# EAGLE board MiniGen-Panel-v10 (EAGLE 6.5.0), part 1 of 3
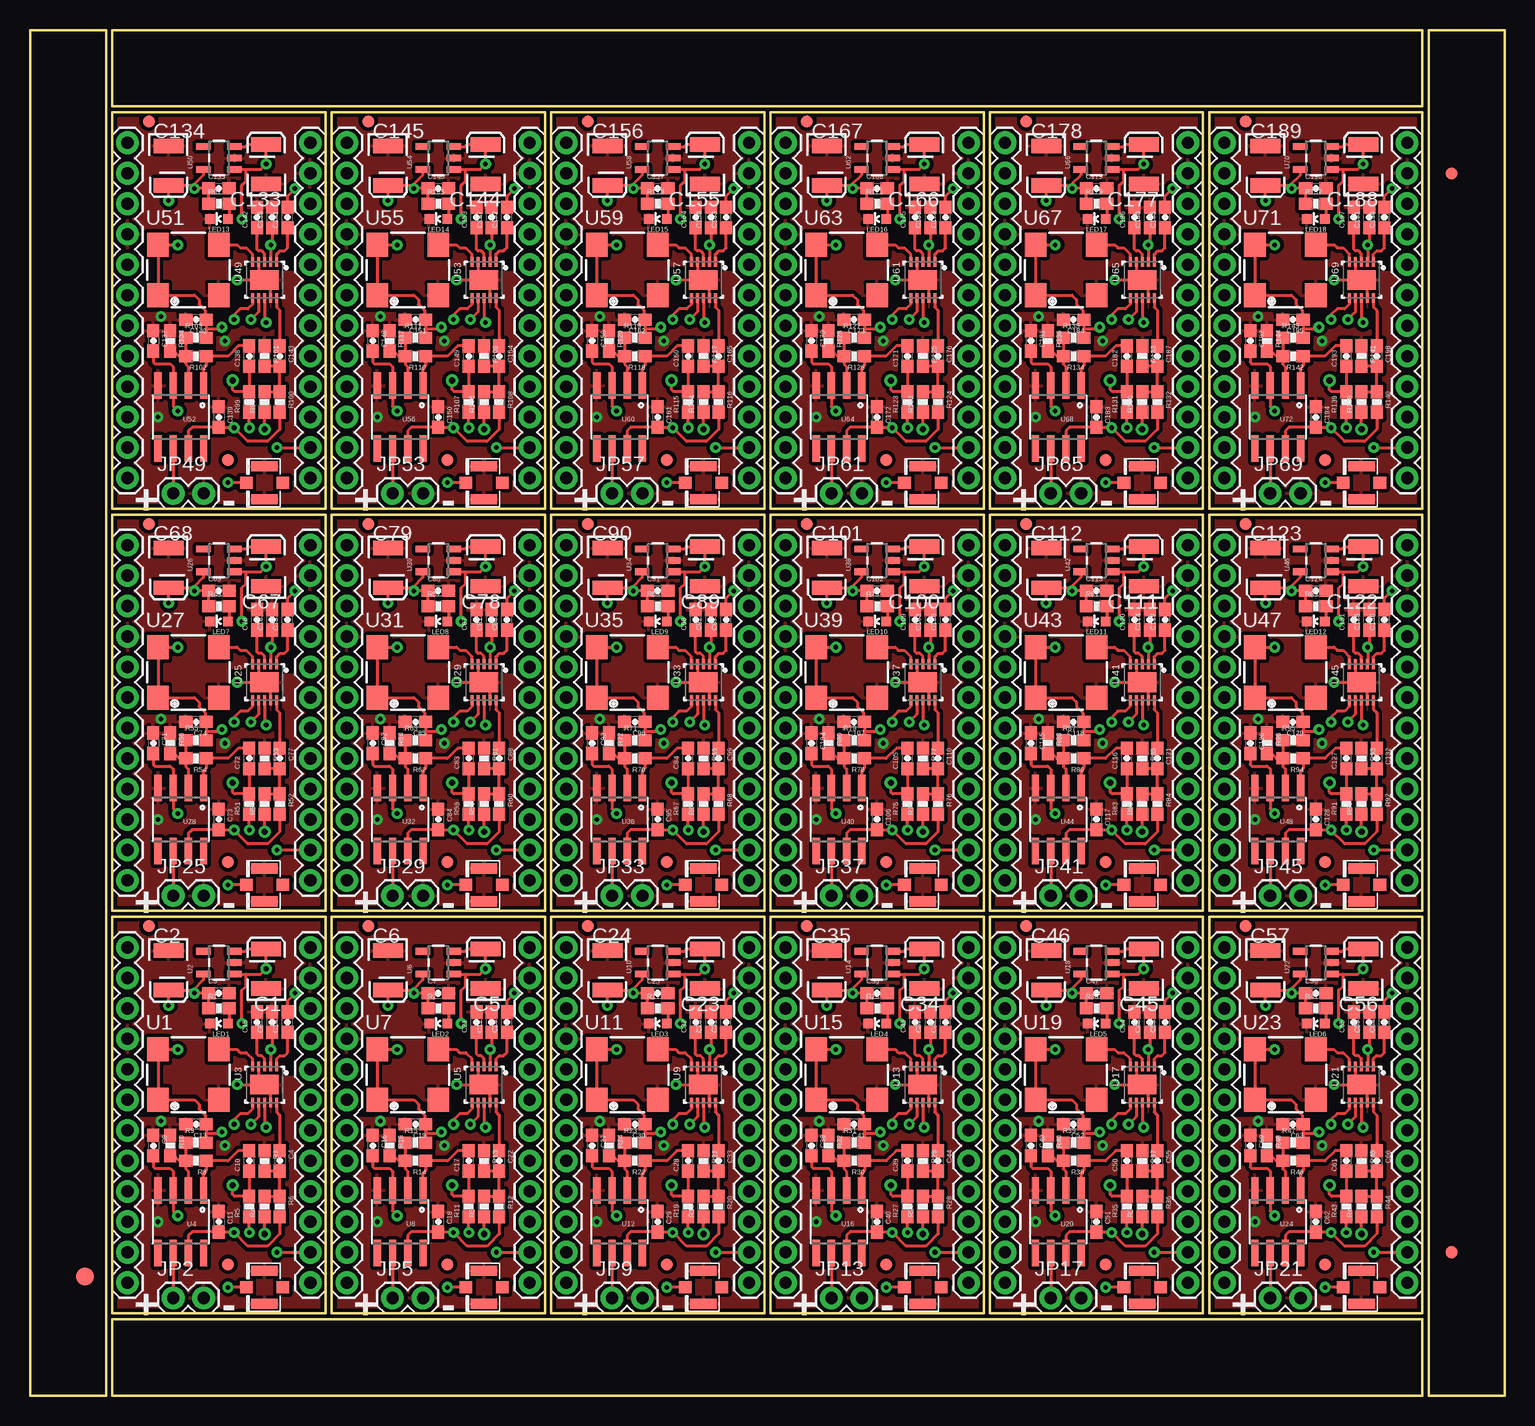
[diagram p0: board, top side]
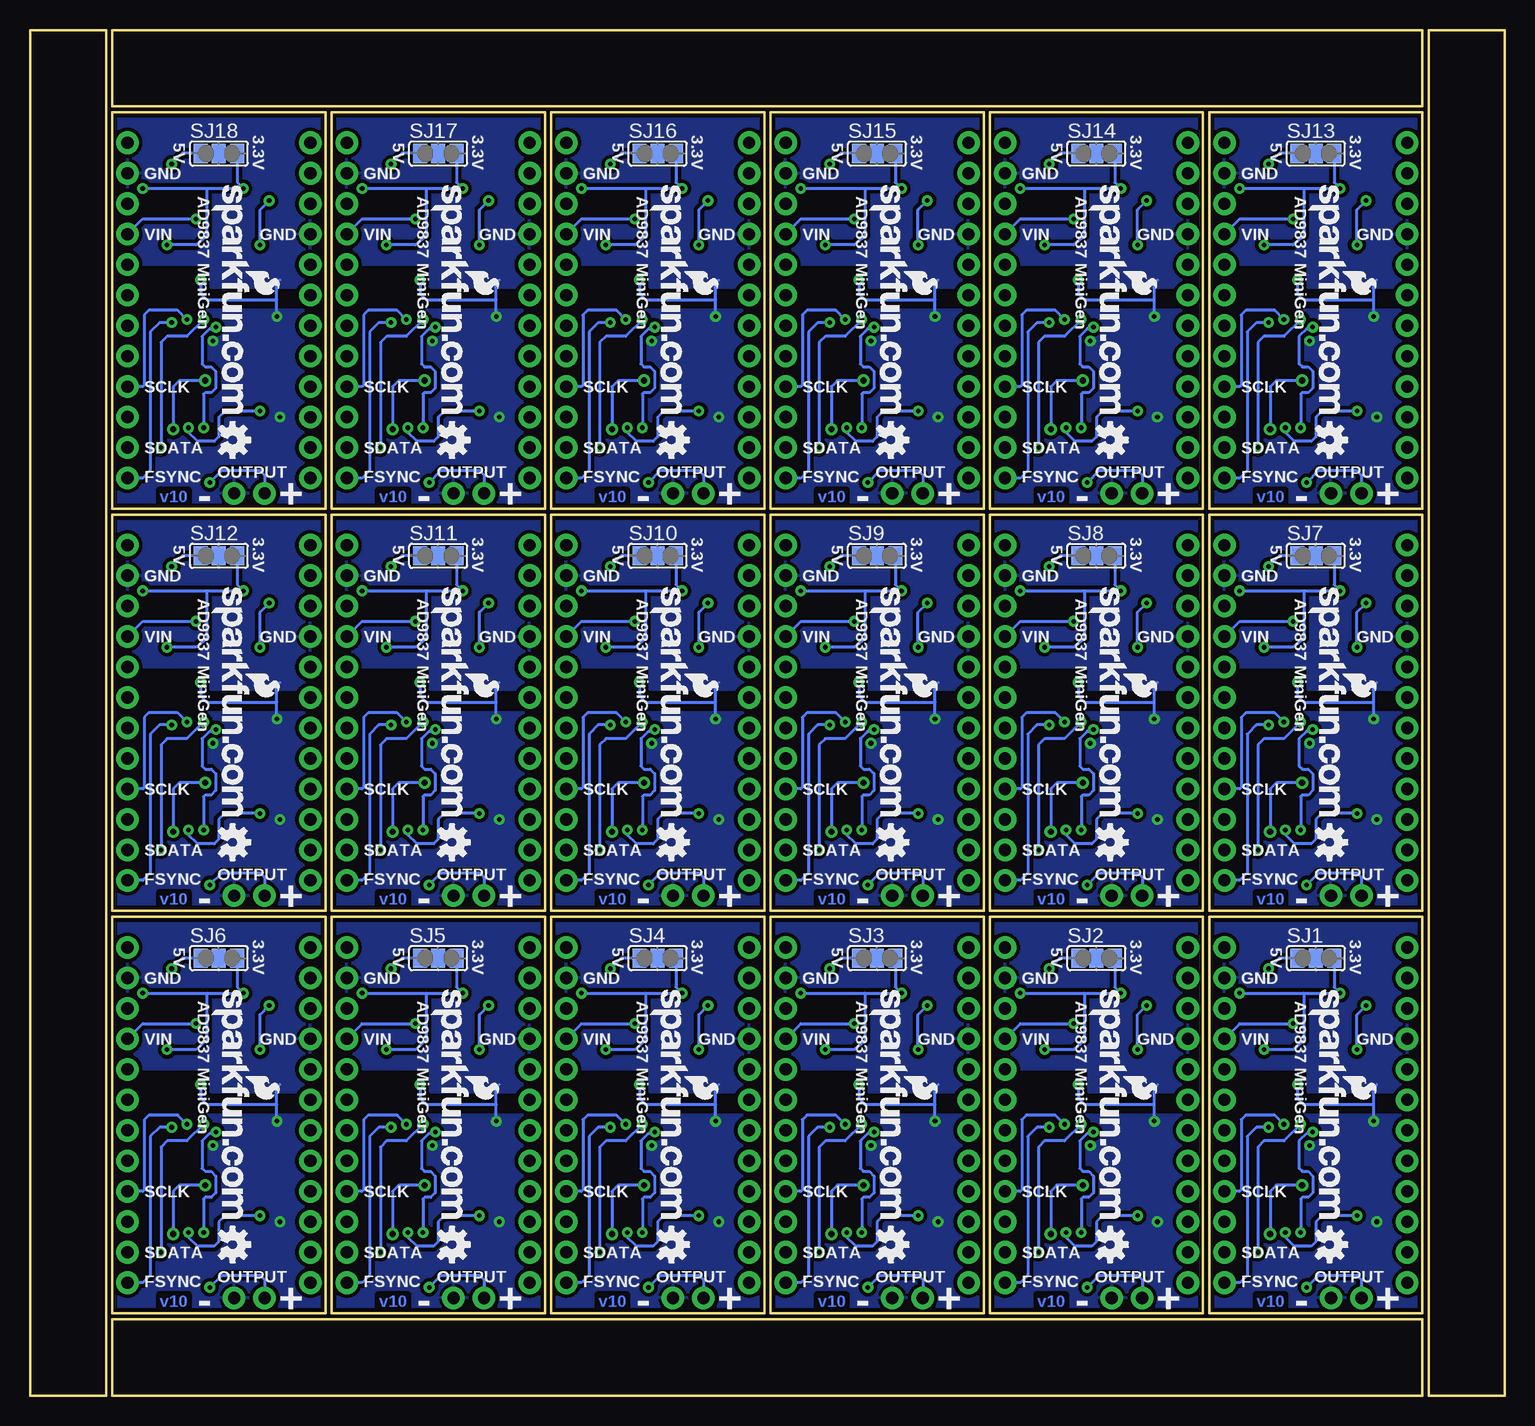
[diagram p1: board, bottom side, seen from below]

Size 122.94 x 113.79 mm. Coordinates in mm from the lower left corner, seen from the top.
Outline: 6.86,6.86 24.64,6.86 24.64,39.88 6.86,39.88 6.86,6.86
Outline: 25.15,6.86 42.93,6.86 42.93,39.88 25.15,39.88 25.15,6.86
Outline: 43.43,6.86 61.21,6.86 61.21,39.88 43.43,39.88 43.43,6.86
Outline: 61.72,6.86 79.5,6.86 79.5,39.88 61.72,39.88 61.72,6.86
Outline: 80.01,6.86 97.79,6.86 97.79,39.88 80.01,39.88 80.01,6.86
Outline: 98.3,6.86 116.08,6.86 116.08,39.88 98.3,39.88 98.3,6.86
Outline: 6.86,40.39 24.64,40.39 24.64,73.41 6.86,73.41 6.86,40.39
Outline: 25.15,40.39 42.93,40.39 42.93,73.41 25.15,73.41 25.15,40.39
Outline: 43.43,40.39 61.21,40.39 61.21,73.41 43.43,73.41 43.43,40.39
Outline: 61.72,40.39 79.5,40.39 79.5,73.41 61.72,73.41 61.72,40.39
Outline: 80.01,40.39 97.79,40.39 97.79,73.41 80.01,73.41 80.01,40.39
Outline: 98.3,40.39 116.08,40.39 116.08,73.41 98.3,73.41 98.3,40.39
Outline: 6.86,73.91 24.64,73.91 24.64,106.93 6.86,106.93 6.86,73.91
Outline: 25.15,73.91 42.93,73.91 42.93,106.93 25.15,106.93 25.15,73.91
Outline: 43.43,73.91 61.21,73.91 61.21,106.93 43.43,106.93 43.43,73.91
Outline: 61.72,73.91 79.5,73.91 79.5,106.93 61.72,106.93 61.72,73.91
Outline: 80.01,73.91 97.79,73.91 97.79,106.93 80.01,106.93 80.01,73.91
Outline: 98.3,73.91 116.08,73.91 116.08,106.93 98.3,106.93 98.3,73.91
Outline: 6.35,0 6.35,113.79 0,113.79 0,0 6.35,0
Outline: 6.86,0 116.08,0 116.08,6.35 6.86,6.35 6.86,0
Outline: 122.94,0 122.94,113.79 116.59,113.79 116.59,0 122.94,0
Outline: 116.08,113.79 6.86,113.79 6.86,107.44 116.08,107.44 116.08,113.79
Copper layers (1*16): Top 0.035mm / dielectric 1.5mm / Bottom 0.035mm
Design rules "Sparkfun": minimum track width 8mil, minimum drill 20mil, track to track 8mil, track to pad 8mil, pad to pad 8mil, via to via 8mil, smd to smd 8mil, copper to edge 8mil, drill to drill 8mil, minimum pad ring 12mil, minimum via ring 10mil, stop-mask expansion 4mil, vias tented up to drill 20mil, thermal gap 10mil

## Footprints (pad centres in the part's own frame; a part is rotated, then mirrored left to right if it is on the bottom)
EIA3528 = smd 1.2 x 2.5: A 1.65,0; C -1.65,0
0603-CAP = smd 1.1 x 1: 1 -0.85,0; 2 0.85,0
FIDUCIAL-1.5X3 = smd 1.5 x 1.5: 1 0,0
FIDUCIAL-1X2 = smd 1 x 1: 1 0,0
U.FL = smd 2.2 x 0.85: P$1 0,1.375; P$2 0,-1.375 | smd 1.05 x 1: P$3 1.525,0; P$4 -1.525,0
1X12 = drill 1.016 pad 1.88: 1 0,0; 2 2.54,0; 3 5.08,0; 4 7.62,0; 5 10.16,0; 6 12.7,0; 7 15.24,0; 8 17.78,0; 9 20.32,0; 10 22.86,0; 11 25.4,0; 12 27.94,0
1X02 = drill 1.016 pad 1.88: 1 0,0; 2 2.54,0
LED-0603 = smd 0.8 x 0.8: A 0,-0.75; C 0,0.75
0603-RES = smd 1.1 x 1: 1 -0.85,0; 2 0.85,0
SJ_2 = smd 1.168 x 1.6: 1 -1.524,0; 2 0,0; 3 1.524,0
CRYSTAL-SMD-7X5 = smd 1.8 x 2: P$1 0,0; P$2 5.08,0; P$3 5.08,4.2; P$4 0,4.2
SOT23-5 = smd 0.55 x 1.2: 1 -0.95,-1.3; 2 0,-1.3; 3 0.95,-1.3; 4 0.95,1.3; 5 -0.95,1.3
AD9837 = smd 1.64 x 2.38: P$0 0,0 | smd 0.8 x 0.25: P$1 -1.5,1; P$2 -1.5,0.5; P$3 -1.5,0; P$4 -1.5,-0.5; P$5 -1.5,-1; P$6 1.5,-1; P$7 1.5,-0.5; P$8 1.5,0; P$9 1.5,0.5; P$10 1.5,1
SO08 = smd 0.61 x 2.21: 1 -1.905,-2.616; 2 -0.635,-2.616; 3 0.635,-2.616; 4 1.905,-2.616; 5 1.905,2.616; 6 0.635,2.616; 7 -0.635,2.616; 8 -1.905,2.616

## Placement (x,y rotation side)
C1  10uF  [EIA3528]  19.68,35.56 90 top
C2  10uF  [EIA3528]  11.56,35.43 270 top
C3  0.1uF  [0603-CAP]  15.75,33.53 0 top
C4  10uF, 6.3V  [0603-CAP]  20.83,19.56 270 top
C5  10uF  [EIA3528]  37.97,35.56 90 top
C6  10uF  [EIA3528]  29.84,35.43 270 top
C7  0.1uF  [0603-CAP]  34.04,33.53 0 top
C8  0.1uF  [0603-CAP]  20.19,31.11 90 top
C9  18pF  [0603-CAP]  10.29,20.83 270 top
C10  18pF  [0603-CAP]  18.29,19.56 90 top
C11  0.1uF  [0603-CAP]  15.75,14.48 270 top
C12  0.1uF  [0603-CAP]  38.48,31.11 90 top
C13  0.1uF  [0603-CAP]  13.84,22.61 180 top
C14  10nF  [0603-CAP]  21.46,31.11 90 top
C15  0.1uF  [0603-CAP]  18.92,31.11 90 top
C16  18pF  [0603-CAP]  28.57,20.83 270 top
C17  18pF  [0603-CAP]  36.58,19.56 90 top
C18  0.1uF  [0603-CAP]  34.04,14.48 270 top
C19  0.1uF  [0603-CAP]  32.13,22.61 180 top
C20  10nF  [0603-CAP]  39.75,31.11 90 top
C21  0.1uF  [0603-CAP]  37.21,31.11 90 top
C22  10uF, 6.3V  [0603-CAP]  39.12,19.56 270 top
C23  10uF  [EIA3528]  56.26,35.56 90 top
C24  10uF  [EIA3528]  48.13,35.43 270 top
C25  0.1uF  [0603-CAP]  52.32,33.53 0 top
C26  0.1uF  [0603-CAP]  56.77,31.11 90 top
C27  18pF  [0603-CAP]  46.86,20.83 270 top
C28  18pF  [0603-CAP]  54.86,19.56 90 top
C29  0.1uF  [0603-CAP]  52.32,14.48 270 top
C30  0.1uF  [0603-CAP]  50.42,22.61 180 top
C31  10nF  [0603-CAP]  58.04,31.11 90 top
C32  0.1uF  [0603-CAP]  55.5,31.11 90 top
C33  10uF, 6.3V  [0603-CAP]  57.4,19.56 270 top
C34  10uF  [EIA3528]  74.55,35.56 90 top
C35  10uF  [EIA3528]  66.42,35.43 270 top
C36  0.1uF  [0603-CAP]  70.61,33.53 0 top
C37  0.1uF  [0603-CAP]  75.06,31.11 90 top
C38  18pF  [0603-CAP]  65.15,20.83 270 top
C39  18pF  [0603-CAP]  73.15,19.56 90 top
C40  0.1uF  [0603-CAP]  70.61,14.48 270 top
C41  0.1uF  [0603-CAP]  68.71,22.61 180 top
C42  10nF  [0603-CAP]  76.33,31.11 90 top
C43  0.1uF  [0603-CAP]  73.79,31.11 90 top
C44  10uF, 6.3V  [0603-CAP]  75.69,19.56 270 top
C45  10uF  [EIA3528]  92.84,35.56 90 top
C46  10uF  [EIA3528]  84.71,35.43 270 top
C47  0.1uF  [0603-CAP]  88.9,33.53 0 top
C48  0.1uF  [0603-CAP]  93.34,31.11 90 top
C49  18pF  [0603-CAP]  83.44,20.83 270 top
C50  18pF  [0603-CAP]  91.44,19.56 90 top
C51  0.1uF  [0603-CAP]  88.9,14.48 270 top
C52  0.1uF  [0603-CAP]  87,22.61 180 top
C53  10nF  [0603-CAP]  94.61,31.11 90 top
C54  0.1uF  [0603-CAP]  92.08,31.11 90 top
C55  10uF, 6.3V  [0603-CAP]  93.98,19.56 270 top
C56  10uF  [EIA3528]  111.12,35.56 90 top
C57  10uF  [EIA3528]  103,35.43 270 top
C58  0.1uF  [0603-CAP]  107.19,33.53 0 top
C59  0.1uF  [0603-CAP]  111.63,31.11 90 top
C60  18pF  [0603-CAP]  101.73,20.83 270 top
C61  18pF  [0603-CAP]  109.73,19.56 90 top
C62  0.1uF  [0603-CAP]  107.19,14.48 270 top
C63  0.1uF  [0603-CAP]  105.28,22.61 180 top
C64  10nF  [0603-CAP]  112.9,31.11 90 top
C65  0.1uF  [0603-CAP]  110.36,31.11 90 top
C66  10uF, 6.3V  [0603-CAP]  112.27,19.56 270 top
C67  10uF  [EIA3528]  19.68,69.09 90 top
C68  10uF  [EIA3528]  11.56,68.96 270 top
C69  0.1uF  [0603-CAP]  15.75,67.06 0 top
C70  0.1uF  [0603-CAP]  20.19,64.64 90 top
C71  18pF  [0603-CAP]  10.29,54.36 270 top
C72  18pF  [0603-CAP]  18.29,53.09 90 top
C73  0.1uF  [0603-CAP]  15.75,48.01 270 top
C74  0.1uF  [0603-CAP]  13.84,56.13 180 top
C75  10nF  [0603-CAP]  21.46,64.64 90 top
C76  0.1uF  [0603-CAP]  18.92,64.64 90 top
C77  10uF, 6.3V  [0603-CAP]  20.83,53.09 270 top
C78  10uF  [EIA3528]  37.97,69.09 90 top
C79  10uF  [EIA3528]  29.84,68.96 270 top
C80  0.1uF  [0603-CAP]  34.04,67.06 0 top
C81  0.1uF  [0603-CAP]  38.48,64.64 90 top
C82  18pF  [0603-CAP]  28.57,54.36 270 top
C83  18pF  [0603-CAP]  36.58,53.09 90 top
C84  0.1uF  [0603-CAP]  34.04,48.01 270 top
C85  0.1uF  [0603-CAP]  32.13,56.13 180 top
C86  10nF  [0603-CAP]  39.75,64.64 90 top
C87  0.1uF  [0603-CAP]  37.21,64.64 90 top
C88  10uF, 6.3V  [0603-CAP]  39.12,53.09 270 top
C89  10uF  [EIA3528]  56.26,69.09 90 top
C90  10uF  [EIA3528]  48.13,68.96 270 top
C91  0.1uF  [0603-CAP]  52.32,67.06 0 top
C92  0.1uF  [0603-CAP]  56.77,64.64 90 top
C93  18pF  [0603-CAP]  46.86,54.36 270 top
C94  18pF  [0603-CAP]  54.86,53.09 90 top
C95  0.1uF  [0603-CAP]  52.32,48.01 270 top
C96  0.1uF  [0603-CAP]  50.42,56.13 180 top
C97  10nF  [0603-CAP]  58.04,64.64 90 top
C98  0.1uF  [0603-CAP]  55.5,64.64 90 top
C99  10uF, 6.3V  [0603-CAP]  57.4,53.09 270 top
C100  10uF  [EIA3528]  74.55,69.09 90 top
C101  10uF  [EIA3528]  66.42,68.96 270 top
C102  0.1uF  [0603-CAP]  70.61,67.06 0 top
C103  0.1uF  [0603-CAP]  75.06,64.64 90 top
C104  18pF  [0603-CAP]  65.15,54.36 270 top
C105  18pF  [0603-CAP]  73.15,53.09 90 top
C106  0.1uF  [0603-CAP]  70.61,48.01 270 top
C107  0.1uF  [0603-CAP]  68.71,56.13 180 top
C108  10nF  [0603-CAP]  76.33,64.64 90 top
C109  0.1uF  [0603-CAP]  73.79,64.64 90 top
C110  10uF, 6.3V  [0603-CAP]  75.69,53.09 270 top
C111  10uF  [EIA3528]  92.84,69.09 90 top
C112  10uF  [EIA3528]  84.71,68.96 270 top
C113  0.1uF  [0603-CAP]  88.9,67.06 0 top
C114  0.1uF  [0603-CAP]  93.34,64.64 90 top
C115  18pF  [0603-CAP]  83.44,54.36 270 top
C116  18pF  [0603-CAP]  91.44,53.09 90 top
C117  0.1uF  [0603-CAP]  88.9,48.01 270 top
C118  0.1uF  [0603-CAP]  87,56.13 180 top
C119  10nF  [0603-CAP]  94.61,64.64 90 top
C120  0.1uF  [0603-CAP]  92.08,64.64 90 top
C121  10uF, 6.3V  [0603-CAP]  93.98,53.09 270 top
C122  10uF  [EIA3528]  111.12,69.09 90 top
C123  10uF  [EIA3528]  103,68.96 270 top
C124  0.1uF  [0603-CAP]  107.19,67.06 0 top
C125  0.1uF  [0603-CAP]  111.63,64.64 90 top
C126  18pF  [0603-CAP]  101.73,54.36 270 top
C127  18pF  [0603-CAP]  109.73,53.09 90 top
C128  0.1uF  [0603-CAP]  107.19,48.01 270 top
C129  0.1uF  [0603-CAP]  105.28,56.13 180 top
C130  10nF  [0603-CAP]  112.9,64.64 90 top
C131  0.1uF  [0603-CAP]  110.36,64.64 90 top
C132  10uF, 6.3V  [0603-CAP]  112.27,53.09 270 top
C133  10uF  [EIA3528]  19.68,102.62 90 top
C134  10uF  [EIA3528]  11.56,102.49 270 top
C135  0.1uF  [0603-CAP]  15.75,100.58 0 top
C136  0.1uF  [0603-CAP]  20.19,98.17 90 top
C137  18pF  [0603-CAP]  10.29,87.88 270 top
C138  18pF  [0603-CAP]  18.29,86.61 90 top
C139  0.1uF  [0603-CAP]  15.75,81.53 270 top
C140  0.1uF  [0603-CAP]  13.84,89.66 180 top
C141  10nF  [0603-CAP]  21.46,98.17 90 top
C142  0.1uF  [0603-CAP]  18.92,98.17 90 top
C143  10uF, 6.3V  [0603-CAP]  20.83,86.61 270 top
C144  10uF  [EIA3528]  37.97,102.62 90 top
C145  10uF  [EIA3528]  29.84,102.49 270 top
C146  0.1uF  [0603-CAP]  34.04,100.58 0 top
C147  0.1uF  [0603-CAP]  38.48,98.17 90 top
C148  18pF  [0603-CAP]  28.57,87.88 270 top
C149  18pF  [0603-CAP]  36.58,86.61 90 top
C150  0.1uF  [0603-CAP]  34.04,81.53 270 top
C151  0.1uF  [0603-CAP]  32.13,89.66 180 top
C152  10nF  [0603-CAP]  39.75,98.17 90 top
C153  0.1uF  [0603-CAP]  37.21,98.17 90 top
C154  10uF, 6.3V  [0603-CAP]  39.12,86.61 270 top
C155  10uF  [EIA3528]  56.26,102.62 90 top
C156  10uF  [EIA3528]  48.13,102.49 270 top
C157  0.1uF  [0603-CAP]  52.32,100.58 0 top
C158  0.1uF  [0603-CAP]  56.77,98.17 90 top
C159  18pF  [0603-CAP]  46.86,87.88 270 top
C160  18pF  [0603-CAP]  54.86,86.61 90 top
C161  0.1uF  [0603-CAP]  52.32,81.53 270 top
C162  0.1uF  [0603-CAP]  50.42,89.66 180 top
C163  10nF  [0603-CAP]  58.04,98.17 90 top
C164  0.1uF  [0603-CAP]  55.5,98.17 90 top
C165  10uF, 6.3V  [0603-CAP]  57.4,86.61 270 top
C166  10uF  [EIA3528]  74.55,102.62 90 top
C167  10uF  [EIA3528]  66.42,102.49 270 top
C168  0.1uF  [0603-CAP]  70.61,100.58 0 top
C169  0.1uF  [0603-CAP]  75.06,98.17 90 top
C170  18pF  [0603-CAP]  65.15,87.88 270 top
C171  18pF  [0603-CAP]  73.15,86.61 90 top
C172  0.1uF  [0603-CAP]  70.61,81.53 270 top
C173  0.1uF  [0603-CAP]  68.71,89.66 180 top
C174  10nF  [0603-CAP]  76.33,98.17 90 top
C175  0.1uF  [0603-CAP]  73.79,98.17 90 top
C176  10uF, 6.3V  [0603-CAP]  75.69,86.61 270 top
C177  10uF  [EIA3528]  92.84,102.62 90 top
C178  10uF  [EIA3528]  84.71,102.49 270 top
C179  0.1uF  [0603-CAP]  88.9,100.58 0 top
C180  0.1uF  [0603-CAP]  93.34,98.17 90 top
C181  18pF  [0603-CAP]  83.44,87.88 270 top
C182  18pF  [0603-CAP]  91.44,86.61 90 top
C183  0.1uF  [0603-CAP]  88.9,81.53 270 top
C184  0.1uF  [0603-CAP]  87,89.66 180 top
C185  10nF  [0603-CAP]  94.61,98.17 90 top
C186  0.1uF  [0603-CAP]  92.08,98.17 90 top
C187  10uF, 6.3V  [0603-CAP]  93.98,86.61 270 top
C188  10uF  [EIA3528]  111.12,102.62 90 top
C189  10uF  [EIA3528]  103,102.49 270 top
C190  0.1uF  [0603-CAP]  107.19,100.58 0 top
C191  0.1uF  [0603-CAP]  111.63,98.17 90 top
C192  18pF  [0603-CAP]  101.73,87.88 270 top
C193  18pF  [0603-CAP]  109.73,86.61 90 top
C194  0.1uF  [0603-CAP]  107.19,81.53 270 top
C195  0.1uF  [0603-CAP]  105.28,89.66 180 top
C196  10nF  [0603-CAP]  112.9,98.17 90 top
C197  0.1uF  [0603-CAP]  110.36,98.17 90 top
C198  10uF, 6.3V  [0603-CAP]  112.27,86.61 270 top
E$1  [FIDUCIAL-1.5X3]  4.57,9.91 0 top
E$4  [FIDUCIAL-1X2]  118.49,11.94 0 top
E$6  [FIDUCIAL-1X2]  118.49,101.85 180 top
FID1  FIDUCIAL1X2  [FIDUCIAL-1X2]  9.91,39.12 0 top
FID2  FIDUCIAL1X2  [FIDUCIAL-1X2]  16.51,10.92 0 top
FID3  FIDUCIAL1X2  [FIDUCIAL-1X2]  28.19,39.12 0 top
FID4  FIDUCIAL1X2  [FIDUCIAL-1X2]  34.8,10.92 0 top
FID5  FIDUCIAL1X2  [FIDUCIAL-1X2]  46.48,39.12 0 top
FID6  FIDUCIAL1X2  [FIDUCIAL-1X2]  53.09,10.92 0 top
FID7  FIDUCIAL1X2  [FIDUCIAL-1X2]  64.77,39.12 0 top
FID8  FIDUCIAL1X2  [FIDUCIAL-1X2]  71.37,10.92 0 top
FID9  FIDUCIAL1X2  [FIDUCIAL-1X2]  83.06,39.12 0 top
FID10  FIDUCIAL1X2  [FIDUCIAL-1X2]  89.66,10.92 0 top
FID11  FIDUCIAL1X2  [FIDUCIAL-1X2]  101.35,39.12 0 top
FID12  FIDUCIAL1X2  [FIDUCIAL-1X2]  107.95,10.92 0 top
FID13  FIDUCIAL1X2  [FIDUCIAL-1X2]  9.91,72.64 0 top
FID14  FIDUCIAL1X2  [FIDUCIAL-1X2]  16.51,44.45 0 top
FID15  FIDUCIAL1X2  [FIDUCIAL-1X2]  28.19,72.64 0 top
FID16  FIDUCIAL1X2  [FIDUCIAL-1X2]  34.8,44.45 0 top
FID17  FIDUCIAL1X2  [FIDUCIAL-1X2]  46.48,72.64 0 top
FID18  FIDUCIAL1X2  [FIDUCIAL-1X2]  53.09,44.45 0 top
FID19  FIDUCIAL1X2  [FIDUCIAL-1X2]  64.77,72.64 0 top
FID20  FIDUCIAL1X2  [FIDUCIAL-1X2]  71.37,44.45 0 top
FID21  FIDUCIAL1X2  [FIDUCIAL-1X2]  83.06,72.64 0 top
FID22  FIDUCIAL1X2  [FIDUCIAL-1X2]  89.66,44.45 0 top
FID23  FIDUCIAL1X2  [FIDUCIAL-1X2]  101.35,72.64 0 top
FID24  FIDUCIAL1X2  [FIDUCIAL-1X2]  107.95,44.45 0 top
FID25  FIDUCIAL1X2  [FIDUCIAL-1X2]  9.91,106.17 0 top
FID26  FIDUCIAL1X2  [FIDUCIAL-1X2]  16.51,77.98 0 top
FID27  FIDUCIAL1X2  [FIDUCIAL-1X2]  28.19,106.17 0 top
FID28  FIDUCIAL1X2  [FIDUCIAL-1X2]  34.8,77.98 0 top
FID29  FIDUCIAL1X2  [FIDUCIAL-1X2]  46.48,106.17 0 top
FID30  FIDUCIAL1X2  [FIDUCIAL-1X2]  53.09,77.98 0 top
FID31  FIDUCIAL1X2  [FIDUCIAL-1X2]  64.77,106.17 0 top
FID32  FIDUCIAL1X2  [FIDUCIAL-1X2]  71.37,77.98 0 top
FID33  FIDUCIAL1X2  [FIDUCIAL-1X2]  83.06,106.17 0 top
FID34  FIDUCIAL1X2  [FIDUCIAL-1X2]  89.66,77.98 0 top
FID35  FIDUCIAL1X2  [FIDUCIAL-1X2]  101.35,106.17 0 top
FID36  FIDUCIAL1X2  [FIDUCIAL-1X2]  107.95,77.98 0 top
J1  [U.FL]  19.56,9.02 180 top
J2  [U.FL]  37.85,9.02 180 top
J3  [U.FL]  56.13,9.02 180 top
J4  [U.FL]  74.42,9.02 180 top
J5  [U.FL]  92.71,9.02 180 top
J6  [U.FL]  111,9.02 180 top
J7  [U.FL]  19.56,42.55 180 top
J8  [U.FL]  37.85,42.55 180 top
J9  [U.FL]  56.13,42.55 180 top
J10  [U.FL]  74.42,42.55 180 top
J11  [U.FL]  92.71,42.55 180 top
J12  [U.FL]  111,42.55 180 top
J13  [U.FL]  19.56,76.07 180 top
J14  [U.FL]  37.85,76.07 180 top
J15  [U.FL]  56.13,76.07 180 top
J16  [U.FL]  74.42,76.07 180 top
J17  [U.FL]  92.71,76.07 180 top
J18  [U.FL]  111,76.07 180 top
JP1  M12PTH  [1X12]  8.13,9.4 90 top
JP2  M02PTH  [1X02]  11.94,8.13 0 top
JP3  M12PTH  [1X12]  23.37,37.34 270 top
JP4  LOGO-SFENEW  [SFE-NEW-WEBLOGO]  16.38,33.78 270 bottom
JP5  M02PTH  [1X02]  30.23,8.13 0 top
JP6  M12PTH  [1X12]  26.42,9.4 90 top
JP7  M12PTH  [1X12]  41.66,37.34 270 top
JP8  LOGO-SFENEW  [SFE-NEW-WEBLOGO]  34.67,33.78 270 bottom
JP9  M02PTH  [1X02]  48.51,8.13 0 top
JP10  M12PTH  [1X12]  44.7,9.4 90 top
JP11  M12PTH  [1X12]  59.94,37.34 270 top
JP12  LOGO-SFENEW  [SFE-NEW-WEBLOGO]  52.96,33.78 270 bottom
JP13  M02PTH  [1X02]  66.8,8.13 0 top
JP14  M12PTH  [1X12]  62.99,9.4 90 top
JP15  M12PTH  [1X12]  78.23,37.34 270 top
JP16  LOGO-SFENEW  [SFE-NEW-WEBLOGO]  71.25,33.78 270 bottom
JP17  M02PTH  [1X02]  85.09,8.13 0 top
JP18  M12PTH  [1X12]  81.28,9.4 90 top
JP19  M12PTH  [1X12]  96.52,37.34 270 top
JP20  LOGO-SFENEW  [SFE-NEW-WEBLOGO]  89.53,33.78 270 bottom
JP21  M02PTH  [1X02]  103.38,8.13 0 top
JP22  M12PTH  [1X12]  99.57,9.4 90 top
JP23  M12PTH  [1X12]  114.81,37.34 270 top
JP24  LOGO-SFENEW  [SFE-NEW-WEBLOGO]  107.82,33.78 270 bottom
JP25  M02PTH  [1X02]  11.94,41.66 0 top
JP26  M12PTH  [1X12]  8.13,42.93 90 top
JP27  M12PTH  [1X12]  23.37,70.87 270 top
JP28  LOGO-SFENEW  [SFE-NEW-WEBLOGO]  16.38,67.31 270 bottom
JP29  M02PTH  [1X02]  30.23,41.66 0 top
JP30  M12PTH  [1X12]  26.42,42.93 90 top
JP31  M12PTH  [1X12]  41.66,70.87 270 top
JP32  LOGO-SFENEW  [SFE-NEW-WEBLOGO]  34.67,67.31 270 bottom
JP33  M02PTH  [1X02]  48.51,41.66 0 top
JP34  M12PTH  [1X12]  44.7,42.93 90 top
JP35  M12PTH  [1X12]  59.94,70.87 270 top
JP36  LOGO-SFENEW  [SFE-NEW-WEBLOGO]  52.96,67.31 270 bottom
JP37  M02PTH  [1X02]  66.8,41.66 0 top
JP38  M12PTH  [1X12]  62.99,42.93 90 top
JP39  M12PTH  [1X12]  78.23,70.87 270 top
JP40  LOGO-SFENEW  [SFE-NEW-WEBLOGO]  71.25,67.31 270 bottom
JP41  M02PTH  [1X02]  85.09,41.66 0 top
JP42  M12PTH  [1X12]  81.28,42.93 90 top
JP43  M12PTH  [1X12]  96.52,70.87 270 top
JP44  LOGO-SFENEW  [SFE-NEW-WEBLOGO]  89.53,67.31 270 bottom
JP45  M02PTH  [1X02]  103.38,41.66 0 top
JP46  M12PTH  [1X12]  99.57,42.93 90 top
JP47  M12PTH  [1X12]  114.81,70.87 270 top
JP48  LOGO-SFENEW  [SFE-NEW-WEBLOGO]  107.82,67.31 270 bottom
JP49  M02PTH  [1X02]  11.94,75.18 0 top
JP50  M12PTH  [1X12]  8.13,76.45 90 top
JP51  M12PTH  [1X12]  23.37,104.39 270 top
JP52  LOGO-SFENEW  [SFE-NEW-WEBLOGO]  16.38,100.84 270 bottom
JP53  M02PTH  [1X02]  30.23,75.18 0 top
JP54  M12PTH  [1X12]  26.42,76.45 90 top
JP55  M12PTH  [1X12]  41.66,104.39 270 top
JP56  LOGO-SFENEW  [SFE-NEW-WEBLOGO]  34.67,100.84 270 bottom
JP57  M02PTH  [1X02]  48.51,75.18 0 top
JP58  M12PTH  [1X12]  44.7,76.45 90 top
JP59  M12PTH  [1X12]  59.94,104.39 270 top
JP60  LOGO-SFENEW  [SFE-NEW-WEBLOGO]  52.96,100.84 270 bottom
JP61  M02PTH  [1X02]  66.8,75.18 0 top
JP62  M12PTH  [1X12]  62.99,76.45 90 top
JP63  M12PTH  [1X12]  78.23,104.39 270 top
JP64  LOGO-SFENEW  [SFE-NEW-WEBLOGO]  71.25,100.84 270 bottom
JP65  M02PTH  [1X02]  85.09,75.18 0 top
JP66  M12PTH  [1X12]  81.28,76.45 90 top
JP67  M12PTH  [1X12]  96.52,104.39 270 top
JP68  LOGO-SFENEW  [SFE-NEW-WEBLOGO]  89.53,100.84 270 bottom
JP69  M02PTH  [1X02]  103.38,75.18 0 top
JP70  M12PTH  [1X12]  99.57,76.45 90 top
JP71  M12PTH  [1X12]  114.81,104.39 270 top
JP72  LOGO-SFENEW  [SFE-NEW-WEBLOGO]  107.82,100.84 270 bottom
LED1  RED  [LED-0603]  15.75,30.99 90 top
LED2  RED  [LED-0603]  34.04,30.99 90 top
LED3  RED  [LED-0603]  52.32,30.99 90 top
LED4  RED  [LED-0603]  70.61,30.99 90 top
LED5  RED  [LED-0603]  88.9,30.99 90 top
LED6  RED  [LED-0603]  107.19,30.99 90 top
LED7  RED  [LED-0603]  15.75,64.52 90 top
LED8  RED  [LED-0603]  34.04,64.52 90 top
LED9  RED  [LED-0603]  52.32,64.52 90 top
LED10  RED  [LED-0603]  70.61,64.52 90 top
LED11  RED  [LED-0603]  88.9,64.52 90 top
LED12  RED  [LED-0603]  107.19,64.52 90 top
LED13  RED  [LED-0603]  15.75,98.04 90 top
LED14  RED  [LED-0603]  34.04,98.04 90 top
LED15  RED  [LED-0603]  52.32,98.04 90 top
LED16  RED  [LED-0603]  70.61,98.04 90 top
LED17  RED  [LED-0603]  88.9,98.04 90 top
LED18  RED  [LED-0603]  107.19,98.04 90 top
R1  330  [0603-RES]  15.75,32.26 0 top
R2  330  [0603-RES]  34.04,32.26 0 top
R3  1.8K  [0603-RES]  37.85,15.75 90 top
R4  1.8K  [0603-RES]  19.56,15.75 90 top
R5  2.55K  [0603-RES]  18.29,15.75 90 top
R6  10K  [0603-RES]  20.83,15.75 270 top
R7  10K  [0603-RES]  19.56,19.56 270 top
R8  787  [0603-RES]  13.84,19.56 180 top
R9  1.8K  [0603-RES]  13.84,21.08 0 top
R10  1.8K  [0603-RES]  11.68,20.83 270 top
R11  2.55K  [0603-RES]  36.58,15.75 90 top
R12  10K  [0603-RES]  39.12,15.75 270 top
R13  10K  [0603-RES]  37.85,19.56 270 top
R14  787  [0603-RES]  32.13,19.56 180 top
R15  1.8K  [0603-RES]  32.13,21.08 0 top
R16  1.8K  [0603-RES]  29.97,20.83 270 top
R17  330  [0603-RES]  52.32,32.26 0 top
R18  1.8K  [0603-RES]  56.13,15.75 90 top
R19  2.55K  [0603-RES]  54.86,15.75 90 top
R20  10K  [0603-RES]  57.4,15.75 270 top
R21  10K  [0603-RES]  56.13,19.56 270 top
R22  787  [0603-RES]  50.42,19.56 180 top
R23  1.8K  [0603-RES]  50.42,21.08 0 top
R24  1.8K  [0603-RES]  48.26,20.83 270 top
R25  330  [0603-RES]  70.61,32.26 0 top
R26  1.8K  [0603-RES]  74.42,15.75 90 top
R27  2.55K  [0603-RES]  73.15,15.75 90 top
R28  10K  [0603-RES]  75.69,15.75 270 top
R29  10K  [0603-RES]  74.42,19.56 270 top
R30  787  [0603-RES]  68.71,19.56 180 top
R31  1.8K  [0603-RES]  68.71,21.08 0 top
R32  1.8K  [0603-RES]  66.55,20.83 270 top
R33  330  [0603-RES]  88.9,32.26 0 top
R34  1.8K  [0603-RES]  92.71,15.75 90 top
R35  2.55K  [0603-RES]  91.44,15.75 90 top
R36  10K  [0603-RES]  93.98,15.75 270 top
R37  10K  [0603-RES]  92.71,19.56 270 top
R38  787  [0603-RES]  87,19.56 180 top
R39  1.8K  [0603-RES]  87,21.08 0 top
R40  1.8K  [0603-RES]  84.84,20.83 270 top
R41  330  [0603-RES]  107.19,32.26 0 top
R42  1.8K  [0603-RES]  111,15.75 90 top
R43  2.55K  [0603-RES]  109.73,15.75 90 top
R44  10K  [0603-RES]  112.27,15.75 270 top
R45  10K  [0603-RES]  111,19.56 270 top
R46  787  [0603-RES]  105.28,19.56 180 top
R47  1.8K  [0603-RES]  105.28,21.08 0 top
R48  1.8K  [0603-RES]  103.12,20.83 270 top
R49  330  [0603-RES]  15.75,65.79 0 top
R50  1.8K  [0603-RES]  19.56,49.28 90 top
R51  2.55K  [0603-RES]  18.29,49.28 90 top
R52  10K  [0603-RES]  20.83,49.28 270 top
R53  10K  [0603-RES]  19.56,53.09 270 top
R54  787  [0603-RES]  13.84,53.09 180 top
R55  1.8K  [0603-RES]  13.84,54.61 0 top
R56  1.8K  [0603-RES]  11.68,54.36 270 top
R57  330  [0603-RES]  34.04,65.79 0 top
R58  1.8K  [0603-RES]  37.85,49.28 90 top
R59  2.55K  [0603-RES]  36.58,49.28 90 top
R60  10K  [0603-RES]  39.12,49.28 270 top
R61  10K  [0603-RES]  37.85,53.09 270 top
R62  787  [0603-RES]  32.13,53.09 180 top
R63  1.8K  [0603-RES]  32.13,54.61 0 top
R64  1.8K  [0603-RES]  29.97,54.36 270 top
R65  330  [0603-RES]  52.32,65.79 0 top
R66  1.8K  [0603-RES]  56.13,49.28 90 top
R67  2.55K  [0603-RES]  54.86,49.28 90 top
R68  10K  [0603-RES]  57.4,49.28 270 top
R69  10K  [0603-RES]  56.13,53.09 270 top
R70  787  [0603-RES]  50.42,53.09 180 top
R71  1.8K  [0603-RES]  50.42,54.61 0 top
R72  1.8K  [0603-RES]  48.26,54.36 270 top
R73  330  [0603-RES]  70.61,65.79 0 top
R74  1.8K  [0603-RES]  74.42,49.28 90 top
R75  2.55K  [0603-RES]  73.15,49.28 90 top
R76  10K  [0603-RES]  75.69,49.28 270 top
R77  10K  [0603-RES]  74.42,53.09 270 top
R78  787  [0603-RES]  68.71,53.09 180 top
R79  1.8K  [0603-RES]  68.71,54.61 0 top
R80  1.8K  [0603-RES]  66.55,54.36 270 top
R81  330  [0603-RES]  88.9,65.79 0 top
R82  1.8K  [0603-RES]  92.71,49.28 90 top
R83  2.55K  [0603-RES]  91.44,49.28 90 top
R84  10K  [0603-RES]  93.98,49.28 270 top
R85  10K  [0603-RES]  92.71,53.09 270 top
R86  787  [0603-RES]  87,53.09 180 top
R87  1.8K  [0603-RES]  87,54.61 0 top
R88  1.8K  [0603-RES]  84.84,54.36 270 top
R89  330  [0603-RES]  107.19,65.79 0 top
R90  1.8K  [0603-RES]  111,49.28 90 top
R91  2.55K  [0603-RES]  109.73,49.28 90 top
R92  10K  [0603-RES]  112.27,49.28 270 top
R93  10K  [0603-RES]  111,53.09 270 top
R94  787  [0603-RES]  105.28,53.09 180 top
R95  1.8K  [0603-RES]  105.28,54.61 0 top
R96  1.8K  [0603-RES]  103.12,54.36 270 top
R97  330  [0603-RES]  15.75,99.31 0 top
R98  1.8K  [0603-RES]  19.56,82.8 90 top
R99  2.55K  [0603-RES]  18.29,82.8 90 top
R100  10K  [0603-RES]  20.83,82.8 270 top
R101  10K  [0603-RES]  19.56,86.61 270 top
R102  787  [0603-RES]  13.84,86.61 180 top
R103  1.8K  [0603-RES]  13.84,88.14 0 top
R104  1.8K  [0603-RES]  11.68,87.88 270 top
R105  330  [0603-RES]  34.04,99.31 0 top
R106  1.8K  [0603-RES]  37.85,82.8 90 top
R107  2.55K  [0603-RES]  36.58,82.8 90 top
R108  10K  [0603-RES]  39.12,82.8 270 top
R109  10K  [0603-RES]  37.85,86.61 270 top
R110  787  [0603-RES]  32.13,86.61 180 top
R111  1.8K  [0603-RES]  32.13,88.14 0 top
R112  1.8K  [0603-RES]  29.97,87.88 270 top
R113  330  [0603-RES]  52.32,99.31 0 top
R114  1.8K  [0603-RES]  56.13,82.8 90 top
R115  2.55K  [0603-RES]  54.86,82.8 90 top
R116  10K  [0603-RES]  57.4,82.8 270 top
R117  10K  [0603-RES]  56.13,86.61 270 top
R118  787  [0603-RES]  50.42,86.61 180 top
R119  1.8K  [0603-RES]  50.42,88.14 0 top
R120  1.8K  [0603-RES]  48.26,87.88 270 top
R121  330  [0603-RES]  70.61,99.31 0 top
R122  1.8K  [0603-RES]  74.42,82.8 90 top
R123  2.55K  [0603-RES]  73.15,82.8 90 top
R124  10K  [0603-RES]  75.69,82.8 270 top
R125  10K  [0603-RES]  74.42,86.61 270 top
R126  787  [0603-RES]  68.71,86.61 180 top
R127  1.8K  [0603-RES]  68.71,88.14 0 top
R128  1.8K  [0603-RES]  66.55,87.88 270 top
R129  330  [0603-RES]  88.9,99.31 0 top
R130  1.8K  [0603-RES]  92.71,82.8 90 top
R131  2.55K  [0603-RES]  91.44,82.8 90 top
R132  10K  [0603-RES]  93.98,82.8 270 top
R133  10K  [0603-RES]  92.71,86.61 270 top
R134  787  [0603-RES]  87,86.61 180 top
R135  1.8K  [0603-RES]  87,88.14 0 top
R136  1.8K  [0603-RES]  84.84,87.88 270 top
R137  330  [0603-RES]  107.19,99.31 0 top
R138  1.8K  [0603-RES]  111,82.8 90 top
R139  2.55K  [0603-RES]  109.73,82.8 90 top
R140  10K  [0603-RES]  112.27,82.8 270 top
R141  10K  [0603-RES]  111,86.61 270 top
R142  787  [0603-RES]  105.28,86.61 180 top
R143  1.8K  [0603-RES]  105.28,88.14 0 top
R144  1.8K  [0603-RES]  103.12,87.88 270 top
SJ1  [SJ_2]  15.75,36.45 0 bottom
SJ2  [SJ_2]  34.04,36.45 0 bottom
SJ3  [SJ_2]  52.32,36.45 0 bottom
SJ4  [SJ_2]  70.61,36.45 0 bottom
SJ5  [SJ_2]  88.9,36.45 0 bottom
SJ6  [SJ_2]  107.19,36.45 0 bottom
SJ7  [SJ_2]  15.75,69.98 0 bottom
SJ8  [SJ_2]  34.04,69.98 0 bottom
SJ9  [SJ_2]  52.32,69.98 0 bottom
SJ10  [SJ_2]  70.61,69.98 0 bottom
SJ11  [SJ_2]  88.9,69.98 0 bottom
SJ12  [SJ_2]  107.19,69.98 0 bottom
SJ13  [SJ_2]  15.75,103.5 0 bottom
SJ14  [SJ_2]  34.04,103.5 0 bottom
SJ15  [SJ_2]  52.32,103.5 0 bottom
SJ16  [SJ_2]  70.61,103.5 0 bottom
SJ17  [SJ_2]  88.9,103.5 0 bottom
SJ18  [SJ_2]  107.19,103.5 0 bottom
U1  16MHz  [CRYSTAL-SMD-7X5]  10.67,24.64 0 top
U2  3.3V  [SOT23-5]  15.75,36.07 90 top
U3  AD9837  [AD9837]  19.56,25.91 270 top
U4  [SO08]  12.57,14.48 180 top
U5  AD9837  [AD9837]  37.85,25.91 270 top
U6  3.3V  [SOT23-5]  34.04,36.07 90 top
U7  16MHz  [CRYSTAL-SMD-7X5]  28.96,24.64 0 top
U8  [SO08]  30.86,14.48 180 top
U9  AD9837  [AD9837]  56.13,25.91 270 top
U10  3.3V  [SOT23-5]  52.32,36.07 90 top
U11  16MHz  [CRYSTAL-SMD-7X5]  47.24,24.64 0 top
U12  [SO08]  49.15,14.48 180 top
U13  AD9837  [AD9837]  74.42,25.91 270 top
U14  3.3V  [SOT23-5]  70.61,36.07 90 top
U15  16MHz  [CRYSTAL-SMD-7X5]  65.53,24.64 0 top
U16  [SO08]  67.44,14.48 180 top
U17  AD9837  [AD9837]  92.71,25.91 270 top
U18  3.3V  [SOT23-5]  88.9,36.07 90 top
U19  16MHz  [CRYSTAL-SMD-7X5]  83.82,24.64 0 top
U20  [SO08]  85.72,14.48 180 top
U21  AD9837  [AD9837]  111,25.91 270 top
U22  3.3V  [SOT23-5]  107.19,36.07 90 top
U23  16MHz  [CRYSTAL-SMD-7X5]  102.11,24.64 0 top
U24  [SO08]  104.01,14.48 180 top
U25  AD9837  [AD9837]  19.56,59.44 270 top
U26  3.3V  [SOT23-5]  15.75,69.6 90 top
U27  16MHz  [CRYSTAL-SMD-7X5]  10.67,58.17 0 top
U28  [SO08]  12.57,48.01 180 top
U29  AD9837  [AD9837]  37.85,59.44 270 top
U30  3.3V  [SOT23-5]  34.04,69.6 90 top
U31  16MHz  [CRYSTAL-SMD-7X5]  28.96,58.17 0 top
U32  [SO08]  30.86,48.01 180 top
U33  AD9837  [AD9837]  56.13,59.44 270 top
U34  3.3V  [SOT23-5]  52.32,69.6 90 top
U35  16MHz  [CRYSTAL-SMD-7X5]  47.24,58.17 0 top
U36  [SO08]  49.15,48.01 180 top
U37  AD9837  [AD9837]  74.42,59.44 270 top
U38  3.3V  [SOT23-5]  70.61,69.6 90 top
U39  16MHz  [CRYSTAL-SMD-7X5]  65.53,58.17 0 top
U40  [SO08]  67.44,48.01 180 top
U41  AD9837  [AD9837]  92.71,59.44 270 top
U42  3.3V  [SOT23-5]  88.9,69.6 90 top
U43  16MHz  [CRYSTAL-SMD-7X5]  83.82,58.17 0 top
U44  [SO08]  85.72,48.01 180 top
U45  AD9837  [AD9837]  111,59.44 270 top
U46  3.3V  [SOT23-5]  107.19,69.6 90 top
U47  16MHz  [CRYSTAL-SMD-7X5]  102.11,58.17 0 top
U48  [SO08]  104.01,48.01 180 top
U49  AD9837  [AD9837]  19.56,92.96 270 top
U50  3.3V  [SOT23-5]  15.75,103.12 90 top
U51  16MHz  [CRYSTAL-SMD-7X5]  10.67,91.69 0 top
U52  [SO08]  12.57,81.53 180 top
U53  AD9837  [AD9837]  37.85,92.96 270 top
U54  3.3V  [SOT23-5]  34.04,103.12 90 top
U55  16MHz  [CRYSTAL-SMD-7X5]  28.96,91.69 0 top
U56  [SO08]  30.86,81.53 180 top
U57  AD9837  [AD9837]  56.13,92.96 270 top
U58  3.3V  [SOT23-5]  52.32,103.12 90 top
U59  16MHz  [CRYSTAL-SMD-7X5]  47.24,91.69 0 top
U60  [SO08]  49.15,81.53 180 top
U61  AD9837  [AD9837]  74.42,92.96 270 top
U62  3.3V  [SOT23-5]  70.61,103.12 90 top
U63  16MHz  [CRYSTAL-SMD-7X5]  65.53,91.69 0 top
U64  [SO08]  67.44,81.53 180 top
U65  AD9837  [AD9837]  92.71,92.96 270 top
U66  3.3V  [SOT23-5]  88.9,103.12 90 top
U67  16MHz  [CRYSTAL-SMD-7X5]  83.82,91.69 0 top
U68  [SO08]  85.72,81.53 180 top
U69  AD9837  [AD9837]  111,92.96 270 top
U70  3.3V  [SOT23-5]  107.19,103.12 90 top
U71  16MHz  [CRYSTAL-SMD-7X5]  102.11,91.69 0 top
U72  [SO08]  104.01,81.53 180 top
U$1  OSHW-LOGOS  [OSHW-LOGO-S]  32.89,12.57 270 bottom
U$2  OSHW-LOGOS  [OSHW-LOGO-S]  14.61,12.57 270 bottom
U$3  OSHW-LOGOS  [OSHW-LOGO-S]  51.18,12.57 270 bottom
U$4  OSHW-LOGOS  [OSHW-LOGO-S]  69.47,12.57 270 bottom
U$5  OSHW-LOGOS  [OSHW-LOGO-S]  87.76,12.57 270 bottom
U$6  OSHW-LOGOS  [OSHW-LOGO-S]  106.05,12.57 270 bottom
U$7  OSHW-LOGOS  [OSHW-LOGO-S]  14.61,46.1 270 bottom
U$8  OSHW-LOGOS  [OSHW-LOGO-S]  32.89,46.1 270 bottom
U$9  OSHW-LOGOS  [OSHW-LOGO-S]  51.18,46.1 270 bottom
U$10  OSHW-LOGOS  [OSHW-LOGO-S]  69.47,46.1 270 bottom
U$11  OSHW-LOGOS  [OSHW-LOGO-S]  87.76,46.1 270 bottom
U$12  OSHW-LOGOS  [OSHW-LOGO-S]  106.05,46.1 270 bottom
U$13  OSHW-LOGOS  [OSHW-LOGO-S]  14.61,79.63 270 bottom
U$14  OSHW-LOGOS  [OSHW-LOGO-S]  32.89,79.63 270 bottom
U$15  OSHW-LOGOS  [OSHW-LOGO-S]  51.18,79.63 270 bottom
U$16  OSHW-LOGOS  [OSHW-LOGO-S]  69.47,79.63 270 bottom
U$17  OSHW-LOGOS  [OSHW-LOGO-S]  87.76,79.63 270 bottom
U$18  OSHW-LOGOS  [OSHW-LOGO-S]  106.05,79.63 270 bottom

## Library data of the parts
C1 C2 C5 C6 C23 C24 C34 C35 C45 C46 C56 C57 C67 C68 C78 C79 C89 C90 C100 C101 C111 C112 C122 C123 C133 C134 C144 C145 C155 C156 C166 C167 C177 C178 C188 C189 = SparkFun-Capacitors; PROD_ID: CAP-08063
C3 C7 C8 C11-C13 C15 C18 C19 C21 C25 C26 C29 C30 C32 C36 C37 C40 C41 C43 C47 C48 C51 C52 C54 C58 C59 C62 C63 C65 C69 C70 C73 C74 C76 C80 C81 C84 C85 C87 C91 C92 C95 C96 C98 C102 C103 C106 C107 C109 C113 C114 C117 C118 C120 C124 C125 C128 C129 C131 C135 C136 C139 C140 C142 C146 C147 C150 C151 C153 C157 C158 C161 C162 C164 C168 C169 C172 C173 C175 C179 C180 C183 C184 C186 C190 C191 C194 C195 C197 = SparkFun-Capacitors; PROD_ID: CAP-00810
C4 C22 C33 C44 C55 C66 C77 C88 C99 C110 C121 C132 C143 C154 C165 C176 C187 C198 = SparkFun-Capacitors; PROD_ID: CAP-11015
C9 C10 C16 C17 C27 C28 C38 C39 C49 C50 C60 C61 C71 C72 C82 C83 C93 C94 C104 C105 C115 C116 C126 C127 C137 C138 C148 C149 C159 C160 C170 C171 C181 C182 C192 C193 = SparkFun-Capacitors; PROD_ID: CAP-08267
C14 C20 C31 C42 C53 C64 C75 C86 C97 C108 C119 C130 C141 C152 C163 C174 C185 C196 = SparkFun-Capacitors; PROD_ID: CAP-00867
E$1 E$4 E$6 FID1-FID36 JP4 JP8 JP12 JP16 JP20 JP24 JP28 JP32 JP36 JP40 JP44 JP48 JP52 JP56 JP60 JP64 JP68 JP72 U$1-U$18 = SparkFun-Aesthetics
J1-J18 = SparkFun-Connectors; PROD_ID: CONN-09193; VALUE: U.FL
JP1-JP3 JP5-JP7 JP9-JP11 JP13-JP15 JP17-JP19 JP21-JP23 JP25-JP27 JP29-JP31 JP33-JP35 JP37-JP39 JP41-JP43 JP45-JP47 JP49-JP51 JP53-JP55 JP57-JP59 JP61-JP63 JP65-JP67 JP69-JP71 = SparkFun-Connectors
LED1-LED18 = SparkFun-LED; PROD_ID: DIO-00819
R1 R2 R17 R25 R33 R41 R49 R57 R65 R73 R81 R89 R97 R105 R113 R121 R129 R137 = SparkFun-Resistors; PROD_ID: RES-00818
R3 R4 R9 R10 R15 R16 R18 R23 R24 R26 R31 R32 R34 R39 R40 R42 R47 R48 R50 R55 R56 R58 R63 R64 R66 R71 R72 R74 R79 R80 R82 R87 R88 R90 R95 R96 R98 R103 R104 R106 R111 R112 R114 R119 R120 R122 R127 R128 R130 R135 R136 R138 R143 R144 = SparkFun-Resistors; PROD_ID: RES-09119
R5 R11 R19 R27 R35 R43 R51 R59 R67 R75 R83 R91 R99 R107 R115 R123 R131 R139 = SparkFun-Resistors; PROD_ID: RES-11227
R6 R7 R12 R13 R20 R21 R28 R29 R36 R37 R44 R45 R52 R53 R60 R61 R68 R69 R76 R77 R84 R85 R92 R93 R100 R101 R108 R109 R116 R117 R124 R125 R132 R133 R140 R141 = SparkFun-Resistors; PROD_ID: RES-00824
R8 R14 R22 R30 R38 R46 R54 R62 R70 R78 R86 R94 R102 R110 R118 R126 R134 R142 = SparkFun-Resistors; PROD_ID: RES-11228
SJ1-SJ18 = SparkFun-Passives
U1 U7 U11 U15 U19 U23 U27 U31 U35 U39 U43 U47 U51 U55 U59 U63 U67 U71 = SparkFun-FreqCtrl; PROD_ID: XTAL-11225
U2 U6 U10 U14 U18 U22 U26 U30 U34 U38 U42 U46 U50 U54 U58 U62 U66 U70 = SparkFun-PowerIC; PROD_ID: VREG-00822
U3 U5 U9 U13 U17 U21 U25 U29 U33 U37 U41 U45 U49 U53 U57 U61 U65 U69 = SparkFun-AnalogIC; PROD_ID: IC-11223
U4 U8 U12 U16 U20 U24 U28 U32 U36 U40 U44 U48 U52 U56 U60 U64 U68 U72 = SparkFun-AnalogIC; PROD_ID: IC-11224

## Nets
FSYNC: JP3.12 U3.P$8
FSYNC1: JP7.12 U5.P$8
FSYNC2: JP11.12 U9.P$8
FSYNC3: JP15.12 U13.P$8
FSYNC4: JP19.12 U17.P$8
FSYNC5: JP23.12 U21.P$8
FSYNC6: JP27.12 U25.P$8
FSYNC7: JP31.12 U29.P$8
FSYNC8: JP35.12 U33.P$8
FSYNC9: JP39.12 U37.P$8
FSYNC10: JP43.12 U41.P$8
FSYNC11: JP47.12 U45.P$8
FSYNC12: JP51.12 U49.P$8
FSYNC13: JP55.12 U53.P$8
FSYNC14: JP59.12 U57.P$8
FSYNC15: JP63.12 U61.P$8
FSYNC16: JP67.12 U65.P$8
FSYNC17: JP71.12 U69.P$8
GND: C1.C C2.C C3.2 C8.2 C9.1 C11.1 C13.2 C15.2 J1.P$1 J1.P$2 JP1.9 JP2.2 JP3.2 LED1.C R7.1 R10.1 U1.P$2 U2.2 U3.P$0 U3.P$4 U3.P$9 U4.4
GND1: C5.C C6.C C7.2 C12.2 C16.1 C18.1 C19.2 C21.2 J2.P$1 J2.P$2 JP5.2 JP6.9 JP7.2 LED2.C R13.1 R16.1 U5.P$0 U5.P$4 U5.P$9 U6.2 U7.P$2 U8.4
GND2: C23.C C24.C C25.2 C26.2 C27.1 C29.1 C30.2 C32.2 J3.P$1 J3.P$2 JP9.2 JP10.9 JP11.2 LED3.C R21.1 R24.1 U9.P$0 U9.P$4 U9.P$9 U10.2 U11.P$2 U12.4
GND3: C34.C C35.C C36.2 C37.2 C38.1 C40.1 C41.2 C43.2 J4.P$1 J4.P$2 JP13.2 JP14.9 JP15.2 LED4.C R29.1 R32.1 U13.P$0 U13.P$4 U13.P$9 U14.2 U15.P$2 U16.4
GND4: C45.C C46.C C47.2 C48.2 C49.1 C51.1 C52.2 C54.2 J5.P$1 J5.P$2 JP17.2 JP18.9 JP19.2 LED5.C R37.1 R40.1 U17.P$0 U17.P$4 U17.P$9 U18.2 U19.P$2 U20.4
GND5: C56.C C57.C C58.2 C59.2 C60.1 C62.1 C63.2 C65.2 J6.P$1 J6.P$2 JP21.2 JP22.9 JP23.2 LED6.C R45.1 R48.1 U21.P$0 U21.P$4 U21.P$9 U22.2 U23.P$2 U24.4
GND6: C67.C C68.C C69.2 C70.2 C71.1 C73.1 C74.2 C76.2 J7.P$1 J7.P$2 JP25.2 JP26.9 JP27.2 LED7.C R53.1 R56.1 U25.P$0 U25.P$4 U25.P$9 U26.2 U27.P$2 U28.4
GND7: C78.C C79.C C80.2 C81.2 C82.1 C84.1 C85.2 C87.2 J8.P$1 J8.P$2 JP29.2 JP30.9 JP31.2 LED8.C R61.1 R64.1 U29.P$0 U29.P$4 U29.P$9 U30.2 U31.P$2 U32.4
GND8: C89.C C90.C C91.2 C92.2 C93.1 C95.1 C96.2 C98.2 J9.P$1 J9.P$2 JP33.2 JP34.9 JP35.2 LED9.C R69.1 R72.1 U33.P$0 U33.P$4 U33.P$9 U34.2 U35.P$2 U36.4
GND9: C100.C C101.C C102.2 C103.2 C104.1 C106.1 C107.2 C109.2 J10.P$1 J10.P$2 JP37.2 JP38.9 JP39.2 LED10.C R77.1 R80.1 U37.P$0 U37.P$4 U37.P$9 U38.2 U39.P$2 U40.4
GND10: C111.C C112.C C113.2 C114.2 C115.1 C117.1 C118.2 C120.2 J11.P$1 J11.P$2 JP41.2 JP42.9 JP43.2 LED11.C R85.1 R88.1 U41.P$0 U41.P$4 U41.P$9 U42.2 U43.P$2 U44.4
GND11: C122.C C123.C C124.2 C125.2 C126.1 C128.1 C129.2 C131.2 J12.P$1 J12.P$2 JP45.2 JP46.9 JP47.2 LED12.C R93.1 R96.1 U45.P$0 U45.P$4 U45.P$9 U46.2 U47.P$2 U48.4
GND12: C133.C C134.C C135.2 C136.2 C137.1 C139.1 C140.2 C142.2 J13.P$1 J13.P$2 JP49.2 JP50.9 JP51.2 LED13.C R101.1 R104.1 U49.P$0 U49.P$4 U49.P$9 U50.2 U51.P$2 U52.4
GND13: C144.C C145.C C146.2 C147.2 C148.1 C150.1 C151.2 C153.2 J14.P$1 J14.P$2 JP53.2 JP54.9 JP55.2 LED14.C R109.1 R112.1 U53.P$0 U53.P$4 U53.P$9 U54.2 U55.P$2 U56.4
GND14: C155.C C156.C C157.2 C158.2 C159.1 C161.1 C162.2 C164.2 J15.P$1 J15.P$2 JP57.2 JP58.9 JP59.2 LED15.C R117.1 R120.1 U57.P$0 U57.P$4 U57.P$9 U58.2 U59.P$2 U60.4
GND15: C166.C C167.C C168.2 C169.2 C170.1 C172.1 C173.2 C175.2 J16.P$1 J16.P$2 JP61.2 JP62.9 JP63.2 LED16.C R125.1 R128.1 U61.P$0 U61.P$4 U61.P$9 U62.2 U63.P$2 U64.4
GND16: C177.C C178.C C179.2 C180.2 C181.1 C183.1 C184.2 C186.2 J17.P$1 J17.P$2 JP65.2 JP66.9 JP67.2 LED17.C R133.1 R136.1 U65.P$0 U65.P$4 U65.P$9 U66.2 U67.P$2 U68.4
GND17: C188.C C189.C C190.2 C191.2 C192.1 C194.1 C195.2 C197.2 J18.P$1 J18.P$2 JP69.2 JP70.9 JP71.2 LED18.C R141.1 R144.1 U69.P$0 U69.P$4 U69.P$9 U70.2 U71.P$2 U72.4
MCLK: U1.P$3 U3.P$5
MCLK1: U5.P$5 U7.P$3
MCLK2: U9.P$5 U11.P$3
MCLK3: U13.P$5 U15.P$3
MCLK4: U17.P$5 U19.P$3
MCLK5: U21.P$5 U23.P$3
MCLK6: U25.P$5 U27.P$3
MCLK7: U29.P$5 U31.P$3
MCLK8: U33.P$5 U35.P$3
MCLK9: U37.P$5 U39.P$3
MCLK10: U41.P$5 U43.P$3
MCLK11: U45.P$5 U47.P$3
MCLK12: U49.P$5 U51.P$3
MCLK13: U53.P$5 U55.P$3
MCLK14: U57.P$5 U59.P$3
MCLK15: U61.P$5 U63.P$3
MCLK16: U65.P$5 U67.P$3
MCLK17: U69.P$5 U71.P$3
N$1: LED2.A R2.2
N$2: C22.2 R3.2 R12.1 R13.2
N$3: LED1.A R1.2
N$4: C22.1 U5.P$10
N$5: C20.1 U5.P$1
N$6: C21.1 U5.P$3
N$7: C9.2 R5.1 U4.3
N$8: C10.1 R4.1 R5.2
N$9: C10.2 R8.1 U4.1
N$10: C15.1 U3.P$3
N$11: C16.2 R11.1 U8.3
N$12: R8.2 R9.1 R10.2 U4.2
N$13: C17.1 R3.1 R11.2
N$14: C4.2 R4.2 R6.1 R7.2
N$15: R14.2 R15.1 R16.2 U8.2
N$16: C17.2 R14.1 U8.1
N$17: LED3.A R17.2
N$18: C33.2 R18.2 R20.1 R21.2
N$19: C33.1 U9.P$10
N$20: C31.1 U9.P$1
N$21: C4.1 U3.P$10
N$22: C32.1 U9.P$3
N$23: C14.1 U3.P$1
N$24: C27.2 R19.1 U12.3
N$25: C28.1 R18.1 R19.2
N$26: R22.2 R23.1 R24.2 U12.2
N$27: C28.2 R22.1 U12.1
N$28: LED4.A R25.2
N$29: C44.2 R26.2 R28.1 R29.2
N$30: C44.1 U13.P$10
N$31: C42.1 U13.P$1
N$32: C43.1 U13.P$3
N$33: C38.2 R27.1 U16.3
N$34: C39.1 R26.1 R27.2
N$35: R30.2 R31.1 R32.2 U16.2
N$36: C39.2 R30.1 U16.1
N$37: LED5.A R33.2
N$38: C55.2 R34.2 R36.1 R37.2
N$39: C55.1 U17.P$10
N$40: C53.1 U17.P$1
N$41: C54.1 U17.P$3
N$42: C49.2 R35.1 U20.3
N$43: C50.1 R34.1 R35.2
N$44: R38.2 R39.1 R40.2 U20.2
N$45: C50.2 R38.1 U20.1
N$46: LED6.A R41.2
N$47: C66.2 R42.2 R44.1 R45.2
N$48: C66.1 U21.P$10
N$49: C64.1 U21.P$1
N$50: C65.1 U21.P$3
N$51: C60.2 R43.1 U24.3
N$52: C61.1 R42.1 R43.2
N$53: R46.2 R47.1 R48.2 U24.2
N$54: C61.2 R46.1 U24.1
N$55: LED7.A R49.2
N$56: C77.2 R50.2 R52.1 R53.2
N$57: C77.1 U25.P$10
N$58: C75.1 U25.P$1
N$59: C76.1 U25.P$3
N$60: C71.2 R51.1 U28.3
N$61: C72.1 R50.1 R51.2
N$62: R54.2 R55.1 R56.2 U28.2
N$63: C72.2 R54.1 U28.1
N$64: LED8.A R57.2
N$65: C88.2 R58.2 R60.1 R61.2
N$66: C88.1 U29.P$10
N$67: C86.1 U29.P$1
N$68: C87.1 U29.P$3
N$69: C82.2 R59.1 U32.3
N$70: C83.1 R58.1 R59.2
N$71: R62.2 R63.1 R64.2 U32.2
N$72: C83.2 R62.1 U32.1
N$73: LED9.A R65.2
N$74: C99.2 R66.2 R68.1 R69.2
N$75: C99.1 U33.P$10
N$76: C97.1 U33.P$1
N$77: C98.1 U33.P$3
N$78: C93.2 R67.1 U36.3
N$79: C94.1 R66.1 R67.2
N$80: R70.2 R71.1 R72.2 U36.2
N$81: C94.2 R70.1 U36.1
N$82: LED10.A R73.2
N$83: C110.2 R74.2 R76.1 R77.2
N$84: C110.1 U37.P$10
N$85: C108.1 U37.P$1
N$86: C109.1 U37.P$3
N$87: C104.2 R75.1 U40.3
N$88: C105.1 R74.1 R75.2
N$89: R78.2 R79.1 R80.2 U40.2
N$90: C105.2 R78.1 U40.1
N$91: LED11.A R81.2
N$92: C121.2 R82.2 R84.1 R85.2
N$93: C121.1 U41.P$10
N$94: C119.1 U41.P$1
N$95: C120.1 U41.P$3
N$96: C115.2 R83.1 U44.3
N$97: C116.1 R82.1 R83.2
N$98: R86.2 R87.1 R88.2 U44.2
N$99: C116.2 R86.1 U44.1
N$100: LED12.A R89.2
N$101: C132.2 R90.2 R92.1 R93.2
N$102: C132.1 U45.P$10
N$103: C130.1 U45.P$1
N$104: C131.1 U45.P$3
N$105: C126.2 R91.1 U48.3
N$106: C127.1 R90.1 R91.2
N$107: R94.2 R95.1 R96.2 U48.2
N$108: C127.2 R94.1 U48.1
N$109: LED13.A R97.2
N$110: C143.2 R98.2 R100.1 R101.2
N$111: C143.1 U49.P$10
N$112: C141.1 U49.P$1
N$113: C142.1 U49.P$3
N$114: C137.2 R99.1 U52.3
N$115: C138.1 R98.1 R99.2
N$116: R102.2 R103.1 R104.2 U52.2
N$117: C138.2 R102.1 U52.1
N$118: LED14.A R105.2
N$119: C154.2 R106.2 R108.1 R109.2
N$120: C154.1 U53.P$10
N$121: C152.1 U53.P$1
N$122: C153.1 U53.P$3
N$123: C148.2 R107.1 U56.3
N$124: C149.1 R106.1 R107.2
N$125: R110.2 R111.1 R112.2 U56.2
N$126: C149.2 R110.1 U56.1
N$127: LED15.A R113.2
N$128: C165.2 R114.2 R116.1 R117.2
N$129: C165.1 U57.P$10
N$130: C163.1 U57.P$1
N$131: C164.1 U57.P$3
N$132: C159.2 R115.1 U60.3
N$133: C160.1 R114.1 R115.2
N$134: R118.2 R119.1 R120.2 U60.2
N$135: C160.2 R118.1 U60.1
N$136: LED16.A R121.2
N$137: C176.2 R122.2 R124.1 R125.2
N$138: C176.1 U61.P$10
N$139: C174.1 U61.P$1
N$140: C175.1 U61.P$3
N$141: C170.2 R123.1 U64.3
N$142: C171.1 R122.1 R123.2
N$143: R126.2 R127.1 R128.2 U64.2
N$144: C171.2 R126.1 U64.1
N$145: LED17.A R129.2
N$146: C187.2 R130.2 R132.1 R133.2
N$147: C187.1 U65.P$10
N$148: C185.1 U65.P$1
N$149: C186.1 U65.P$3
N$150: C181.2 R131.1 U68.3
N$151: C182.1 R130.1 R131.2
N$152: R134.2 R135.1 R136.2 U68.2
N$153: C182.2 R134.1 U68.1
N$154: LED18.A R137.2
N$155: C198.2 R138.2 R140.1 R141.2
N$156: C198.1 U69.P$10
N$157: C196.1 U69.P$1
N$158: C197.1 U69.P$3
N$159: C192.2 R139.1 U72.3
N$160: C193.1 R138.1 R139.2
N$161: R142.2 R143.1 R144.2 U72.2
N$162: C193.2 R142.1 U72.1
OUT: J1.P$3 JP2.1 U4.6
OUT1: J2.P$3 JP5.1 U8.6
OUT2: J3.P$3 JP9.1 U12.6
OUT3: J4.P$3 JP13.1 U16.6
OUT4: J5.P$3 JP17.1 U20.6
OUT5: J6.P$3 JP21.1 U24.6
OUT6: J7.P$3 JP25.1 U28.6
OUT7: J8.P$3 JP29.1 U32.6
OUT8: J9.P$3 JP33.1 U36.6
OUT9: J10.P$3 JP37.1 U40.6
OUT10: J11.P$3 JP41.1 U44.6
OUT11: J12.P$3 JP45.1 U48.6
OUT12: J13.P$3 JP49.1 U52.6
OUT13: J14.P$3 JP53.1 U56.6
OUT14: J15.P$3 JP57.1 U60.6
OUT15: J16.P$3 JP61.1 U64.6
OUT16: J17.P$3 JP65.1 U68.6
OUT17: J18.P$3 JP69.1 U72.6
SCLK: JP3.9 U3.P$7
SCLK1: JP7.9 U5.P$7
SCLK2: JP11.9 U9.P$7
SCLK3: JP15.9 U13.P$7
SCLK4: JP19.9 U17.P$7
SCLK5: JP23.9 U21.P$7
SCLK6: JP27.9 U25.P$7
SCLK7: JP31.9 U29.P$7
SCLK8: JP35.9 U33.P$7
SCLK9: JP39.9 U37.P$7
SCLK10: JP43.9 U41.P$7
SCLK11: JP47.9 U45.P$7
SCLK12: JP51.9 U49.P$7
SCLK13: JP55.9 U53.P$7
SCLK14: JP59.9 U57.P$7
SCLK15: JP63.9 U61.P$7
SCLK16: JP67.9 U65.P$7
SCLK17: JP71.9 U69.P$7
SDATA: JP3.11 U3.P$6
SDATA1: JP7.11 U5.P$6
SDATA2: JP11.11 U9.P$6
SDATA3: JP15.11 U13.P$6
SDATA4: JP19.11 U17.P$6
SDATA5: JP23.11 U21.P$6
SDATA6: JP27.11 U25.P$6
SDATA7: JP31.11 U29.P$6
SDATA8: JP35.11 U33.P$6
SDATA9: JP39.11 U37.P$6
SDATA10: JP43.11 U41.P$6
SDATA11: JP47.11 U45.P$6
SDATA12: JP51.11 U49.P$6
SDATA13: JP55.11 U53.P$6
SDATA14: JP59.11 U57.P$6
SDATA15: JP63.11 U61.P$6
SDATA16: JP67.11 U65.P$6
SDATA17: JP71.11 U69.P$6
VCC: C2.A C3.1 C8.1 C11.2 C13.1 C14.2 R1.1 R6.2 R9.2 SJ1.3 U1.P$1 U1.P$4 U2.5 U3.P$2 U4.7
VCC1: C6.A C7.1 C12.1 C18.2 C19.1 C20.2 R2.1 R12.2 R15.2 SJ2.3 U5.P$2 U6.5 U7.P$1 U7.P$4 U8.7
VCC2: C24.A C25.1 C26.1 C29.2 C30.1 C31.2 R17.1 R20.2 R23.2 SJ3.3 U9.P$2 U10.5 U11.P$1 U11.P$4 U12.7
VCC3: C35.A C36.1 C37.1 C40.2 C41.1 C42.2 R25.1 R28.2 R31.2 SJ4.3 U13.P$2 U14.5 U15.P$1 U15.P$4 U16.7
VCC4: C46.A C47.1 C48.1 C51.2 C52.1 C53.2 R33.1 R36.2 R39.2 SJ5.3 U17.P$2 U18.5 U19.P$1 U19.P$4 U20.7
VCC5: C57.A C58.1 C59.1 C62.2 C63.1 C64.2 R41.1 R44.2 R47.2 SJ6.3 U21.P$2 U22.5 U23.P$1 U23.P$4 U24.7
VCC6: C68.A C69.1 C70.1 C73.2 C74.1 C75.2 R49.1 R52.2 R55.2 SJ7.3 U25.P$2 U26.5 U27.P$1 U27.P$4 U28.7
VCC7: C79.A C80.1 C81.1 C84.2 C85.1 C86.2 R57.1 R60.2 R63.2 SJ8.3 U29.P$2 U30.5 U31.P$1 U31.P$4 U32.7
VCC8: C90.A C91.1 C92.1 C95.2 C96.1 C97.2 R65.1 R68.2 R71.2 SJ9.3 U33.P$2 U34.5 U35.P$1 U35.P$4 U36.7
VCC9: C101.A C102.1 C103.1 C106.2 C107.1 C108.2 R73.1 R76.2 R79.2 SJ10.3 U37.P$2 U38.5 U39.P$1 U39.P$4 U40.7
VCC10: C112.A C113.1 C114.1 C117.2 C118.1 C119.2 R81.1 R84.2 R87.2 SJ11.3 U41.P$2 U42.5 U43.P$1 U43.P$4 U44.7
VCC11: C123.A C124.1 C125.1 C128.2 C129.1 C130.2 R89.1 R92.2 R95.2 SJ12.3 U45.P$2 U46.5 U47.P$1 U47.P$4 U48.7
VCC12: C134.A C135.1 C136.1 C139.2 C140.1 C141.2 R97.1 R100.2 R103.2 SJ13.3 U49.P$2 U50.5 U51.P$1 U51.P$4 U52.7
VCC13: C145.A C146.1 C147.1 C150.2 C151.1 C152.2 R105.1 R108.2 R111.2 SJ14.3 U53.P$2 U54.5 U55.P$1 U55.P$4 U56.7
VCC14: C156.A C157.1 C158.1 C161.2 C162.1 C163.2 R113.1 R116.2 R119.2 SJ15.3 U57.P$2 U58.5 U59.P$1 U59.P$4 U60.7
VCC15: C167.A C168.1 C169.1 C172.2 C173.1 C174.2 R121.1 R124.2 R127.2 SJ16.3 U61.P$2 U62.5 U63.P$1 U63.P$4 U64.7
VCC16: C178.A C179.1 C180.1 C183.2 C184.1 C185.2 R129.1 R132.2 R135.2 SJ17.3 U65.P$2 U66.5 U67.P$1 U67.P$4 U68.7
VCC17: C189.A C190.1 C191.1 C194.2 C195.1 C196.2 R137.1 R140.2 R143.2 SJ18.3 U69.P$2 U70.5 U71.P$1 U71.P$4 U72.7
VIN: C1.A JP3.4 SJ1.1 SJ1.2 U2.1 U2.3
VIN1: C5.A JP7.4 SJ2.1 SJ2.2 U6.1 U6.3
VIN2: C23.A JP11.4 SJ3.1 SJ3.2 U10.1 U10.3
VIN3: C34.A JP15.4 SJ4.1 SJ4.2 U14.1 U14.3
VIN4: C45.A JP19.4 SJ5.1 SJ5.2 U18.1 U18.3
VIN5: C56.A JP23.4 SJ6.1 SJ6.2 U22.1 U22.3
VIN6: C67.A JP27.4 SJ7.1 SJ7.2 U26.1 U26.3
VIN7: C78.A JP31.4 SJ8.1 SJ8.2 U30.1 U30.3
VIN8: C89.A JP35.4 SJ9.1 SJ9.2 U34.1 U34.3
VIN9: C100.A JP39.4 SJ10.1 SJ10.2 U38.1 U38.3
VIN10: C111.A JP43.4 SJ11.1 SJ11.2 U42.1 U42.3
VIN11: C122.A JP47.4 SJ12.1 SJ12.2 U46.1 U46.3
VIN12: C133.A JP51.4 SJ13.1 SJ13.2 U50.1 U50.3
VIN13: C144.A JP55.4 SJ14.1 SJ14.2 U54.1 U54.3
VIN14: C155.A JP59.4 SJ15.1 SJ15.2 U58.1 U58.3
VIN15: C166.A JP63.4 SJ16.1 SJ16.2 U62.1 U62.3
VIN16: C177.A JP67.4 SJ17.1 SJ17.2 U66.1 U66.3
VIN17: C188.A JP71.4 SJ18.1 SJ18.2 U70.1 U70.3

## Tracks (layer width: path | path; a pad name or v marks a point on that pad's centre or on a via)
FSYNC  (via drill 0.38)
  Top 0.254: U3.P$8 19.56,22.48 v19.68,22.35
  Bottom 0.254: v19.68,22.35 20.7,22.35 21.46,21.59 21.46,10.03 22.1,9.4 JP3.12
FSYNC1  (via drill 0.38)
  Top 0.254: U5.P$8 37.85,22.48 v37.97,22.35
  Bottom 0.254: v37.97,22.35 38.99,22.35 39.75,21.59 39.75,10.03 40.39,9.4 JP7.12
FSYNC2  (via drill 0.38)
  Top 0.254: U9.P$8 56.13,22.48 v56.26,22.35
  Bottom 0.254: v56.26,22.35 57.28,22.35 58.04,21.59 58.04,10.03 58.67,9.4 JP11.12
FSYNC3  (via drill 0.38)
  Top 0.254: U13.P$8 74.42,22.48 v74.55,22.35
  Bottom 0.254: v74.55,22.35 75.56,22.35 76.33,21.59 76.33,10.03 76.96,9.4 JP15.12
FSYNC4  (via drill 0.38)
  Top 0.254: U17.P$8 92.71,22.48 v92.84,22.35
  Bottom 0.254: v92.84,22.35 93.85,22.35 94.61,21.59 94.61,10.03 95.25,9.4 JP19.12
FSYNC5  (via drill 0.38)
  Top 0.254: U21.P$8 111,22.48 v111.12,22.35
  Bottom 0.254: v111.12,22.35 112.14,22.35 112.9,21.59 112.9,10.03 113.54,9.4 JP23.12
FSYNC6  (via drill 0.38)
  Top 0.254: U25.P$8 19.56,56.01 v19.68,55.88
  Bottom 0.254: v19.68,55.88 20.7,55.88 21.46,55.12 21.46,43.56 22.1,42.93 JP27.12
FSYNC7  (via drill 0.38)
  Top 0.254: U29.P$8 37.85,56.01 v37.97,55.88
  Bottom 0.254: v37.97,55.88 38.99,55.88 39.75,55.12 39.75,43.56 40.39,42.93 JP31.12
FSYNC8  (via drill 0.38)
  Top 0.254: U33.P$8 56.13,56.01 v56.26,55.88
  Bottom 0.254: v56.26,55.88 57.28,55.88 58.04,55.12 58.04,43.56 58.67,42.93 JP35.12
FSYNC9  (via drill 0.38)
  Top 0.254: U37.P$8 74.42,56.01 v74.55,55.88
  Bottom 0.254: v74.55,55.88 75.56,55.88 76.33,55.12 76.33,43.56 76.96,42.93 JP39.12
FSYNC10  (via drill 0.38)
  Top 0.254: U41.P$8 92.71,56.01 v92.84,55.88
  Bottom 0.254: v92.84,55.88 93.85,55.88 94.61,55.12 94.61,43.56 95.25,42.93 JP43.12
FSYNC11  (via drill 0.38)
  Top 0.254: U45.P$8 111,56.01 v111.12,55.88
  Bottom 0.254: v111.12,55.88 112.14,55.88 112.9,55.12 112.9,43.56 113.54,42.93 JP47.12
FSYNC12  (via drill 0.38)
  Top 0.254: U49.P$8 19.56,89.53 v19.68,89.41
  Bottom 0.254: v19.68,89.41 20.7,89.41 21.46,88.65 21.46,77.09 22.1,76.45 JP51.12
FSYNC13  (via drill 0.38)
  Top 0.254: U53.P$8 37.85,89.53 v37.97,89.41
  Bottom 0.254: v37.97,89.41 38.99,89.41 39.75,88.65 39.75,77.09 40.39,76.45 JP55.12
FSYNC14  (via drill 0.38)
  Top 0.254: U57.P$8 56.13,89.53 v56.26,89.41
  Bottom 0.254: v56.26,89.41 57.28,89.41 58.04,88.65 58.04,77.09 58.67,76.45 JP59.12
FSYNC15  (via drill 0.38)
  Top 0.254: U61.P$8 74.42,89.53 v74.55,89.41
  Bottom 0.254: v74.55,89.41 75.56,89.41 76.33,88.65 76.33,77.09 76.96,76.45 JP63.12
FSYNC16  (via drill 0.38)
  Top 0.254: U65.P$8 92.71,89.53 v92.84,89.41
  Bottom 0.254: v92.84,89.41 93.85,89.41 94.61,88.65 94.61,77.09 95.25,76.45 JP67.12
FSYNC17  (via drill 0.38)
  Top 0.254: U69.P$8 111,89.53 v111.12,89.41
  Bottom 0.254: v111.12,89.41 112.14,89.41 112.9,88.65 112.9,77.09 113.54,76.45 JP71.12
GND  (via drill 0.38)
  Top 0.254: U3.P$9 20.06,25.41 U3.P$0 | U3.P$4 19.06,26.41 U3.P$0 | v17.27,25.91 U3.P$0
  Bottom 0.254: v10.92,22.86 10.92,24.26 | v17.27,25.91 17.27,24.77 16.76,24.26 10.92,24.26 | 10.92,24.26 10.92,25.65 10.67,25.91
  other vias: 16.26,20.83 10.67,14.48
  pour Bottom (isolate 0.305): 6.86,39.88 6.86,25.27 16.38,25.27 16.38,27.18 24.64,27.18 24.64,39.88
  pour Top (isolate 0.305): 6.86,39.88 6.86,24 16.38,24 16.38,27.18 24.64,27.18 24.64,39.88
  pour Top (isolate 0.305): 6.86,6.86 6.86,23.11 18.29,23.11 18.29,26.54 24.64,26.54 24.64,6.86
  pour Bottom (isolate 0.305): 6.86,6.86 6.86,23.37 18.29,23.37 18.29,26.54 24.64,26.54 24.64,6.86
GND1  (via drill 0.38)
  Top 0.254: U5.P$9 38.35,25.41 U5.P$0 | U5.P$4 37.35,26.41 U5.P$0 | v35.56,25.91 U5.P$0
  Bottom 0.254: v29.21,22.86 29.21,24.26 | v35.56,25.91 35.56,24.77 35.05,24.26 29.21,24.26 | 29.21,24.26 29.21,25.65 28.96,25.91
  other vias: 34.54,20.83 28.96,14.48
  pour Bottom (isolate 0.305): 25.15,39.88 25.15,25.27 34.67,25.27 34.67,27.18 42.93,27.18 42.93,39.88
  pour Top (isolate 0.305): 25.15,39.88 25.15,24 34.67,24 34.67,27.18 42.93,27.18 42.93,39.88
  pour Top (isolate 0.305): 25.15,6.86 25.15,23.11 36.58,23.11 36.58,26.54 42.93,26.54 42.93,6.86
  pour Bottom (isolate 0.305): 25.15,6.86 25.15,23.37 36.58,23.37 36.58,26.54 42.93,26.54 42.93,6.86
GND2  (via drill 0.38)
  Top 0.254: U9.P$9 56.63,25.41 U9.P$0 | U9.P$4 55.63,26.41 U9.P$0 | v53.85,25.91 U9.P$0
  Bottom 0.254: v47.5,22.86 47.5,24.26 | v53.85,25.91 53.85,24.77 53.34,24.26 47.5,24.26 | 47.5,24.26 47.5,25.65 47.24,25.91
  other vias: 52.83,20.83 47.24,14.48
  pour Bottom (isolate 0.305): 43.43,39.88 43.43,25.27 52.96,25.27 52.96,27.18 61.21,27.18 61.21,39.88
  pour Top (isolate 0.305): 43.43,39.88 43.43,24 52.96,24 52.96,27.18 61.21,27.18 61.21,39.88
  pour Top (isolate 0.305): 43.43,6.86 43.43,23.11 54.86,23.11 54.86,26.54 61.21,26.54 61.21,6.86
  pour Bottom (isolate 0.305): 43.43,6.86 43.43,23.37 54.86,23.37 54.86,26.54 61.21,26.54 61.21,6.86
GND3  (via drill 0.38)
  Top 0.254: U13.P$9 74.92,25.41 U13.P$0 | U13.P$4 73.92,26.41 U13.P$0 | v72.14,25.91 U13.P$0
  Bottom 0.254: v65.79,22.86 65.79,24.26 | v72.14,25.91 72.14,24.77 71.63,24.26 65.79,24.26 | 65.79,24.26 65.79,25.65 65.53,25.91
  other vias: 71.12,20.83 65.53,14.48
  pour Bottom (isolate 0.305): 61.72,39.88 61.72,25.27 71.25,25.27 71.25,27.18 79.5,27.18 79.5,39.88
  pour Top (isolate 0.305): 61.72,39.88 61.72,24 71.25,24 71.25,27.18 79.5,27.18 79.5,39.88
  pour Top (isolate 0.305): 61.72,6.86 61.72,23.11 73.15,23.11 73.15,26.54 79.5,26.54 79.5,6.86
  pour Bottom (isolate 0.305): 61.72,6.86 61.72,23.37 73.15,23.37 73.15,26.54 79.5,26.54 79.5,6.86
GND4  (via drill 0.38)
  Top 0.254: U17.P$9 93.21,25.41 U17.P$0 | U17.P$4 92.21,26.41 U17.P$0 | v90.42,25.91 U17.P$0
  Bottom 0.254: v84.07,22.86 84.07,24.26 | v90.42,25.91 90.42,24.77 89.92,24.26 84.07,24.26 | 84.07,24.26 84.07,25.65 83.82,25.91
  other vias: 89.41,20.83 83.82,14.48
  pour Bottom (isolate 0.305): 80.01,39.88 80.01,25.27 89.53,25.27 89.53,27.18 97.79,27.18 97.79,39.88
  pour Top (isolate 0.305): 80.01,39.88 80.01,24 89.53,24 89.53,27.18 97.79,27.18 97.79,39.88
  pour Top (isolate 0.305): 80.01,6.86 80.01,23.11 91.44,23.11 91.44,26.54 97.79,26.54 97.79,6.86
  pour Bottom (isolate 0.305): 80.01,6.86 80.01,23.37 91.44,23.37 91.44,26.54 97.79,26.54 97.79,6.86
GND5  (via drill 0.38)
  Top 0.254: U21.P$9 111.5,25.41 U21.P$0 | U21.P$4 110.5,26.41 U21.P$0 | v108.71,25.91 U21.P$0
  Bottom 0.254: v102.36,22.86 102.36,24.26 | v108.71,25.91 108.71,24.77 108.2,24.26 102.36,24.26 | 102.36,24.26 102.36,25.65 102.11,25.91
  other vias: 107.7,20.83 102.11,14.48
  pour Bottom (isolate 0.305): 98.3,39.88 98.3,25.27 107.82,25.27 107.82,27.18 116.08,27.18 116.08,39.88
  pour Top (isolate 0.305): 98.3,39.88 98.3,24 107.82,24 107.82,27.18 116.08,27.18 116.08,39.88
  pour Top (isolate 0.305): 98.3,6.86 98.3,23.11 109.73,23.11 109.73,26.54 116.08,26.54 116.08,6.86
  pour Bottom (isolate 0.305): 98.3,6.86 98.3,23.37 109.73,23.37 109.73,26.54 116.08,26.54 116.08,6.86
GND6  (via drill 0.38)
  Top 0.254: U25.P$9 20.06,58.94 U25.P$0 | U25.P$4 19.06,59.94 U25.P$0 | v17.27,59.44 U25.P$0
  Bottom 0.254: v10.92,56.39 10.92,57.78 | v17.27,59.44 17.27,58.29 16.76,57.78 10.92,57.78 | 10.92,57.78 10.92,59.18 10.67,59.44
  other vias: 16.26,54.36 10.67,48.01
  pour Bottom (isolate 0.305): 6.86,73.41 6.86,58.8 16.38,58.8 16.38,60.71 24.64,60.71 24.64,73.41